# EAGLE board IMIKUbrd (EAGLE 7.7.0)
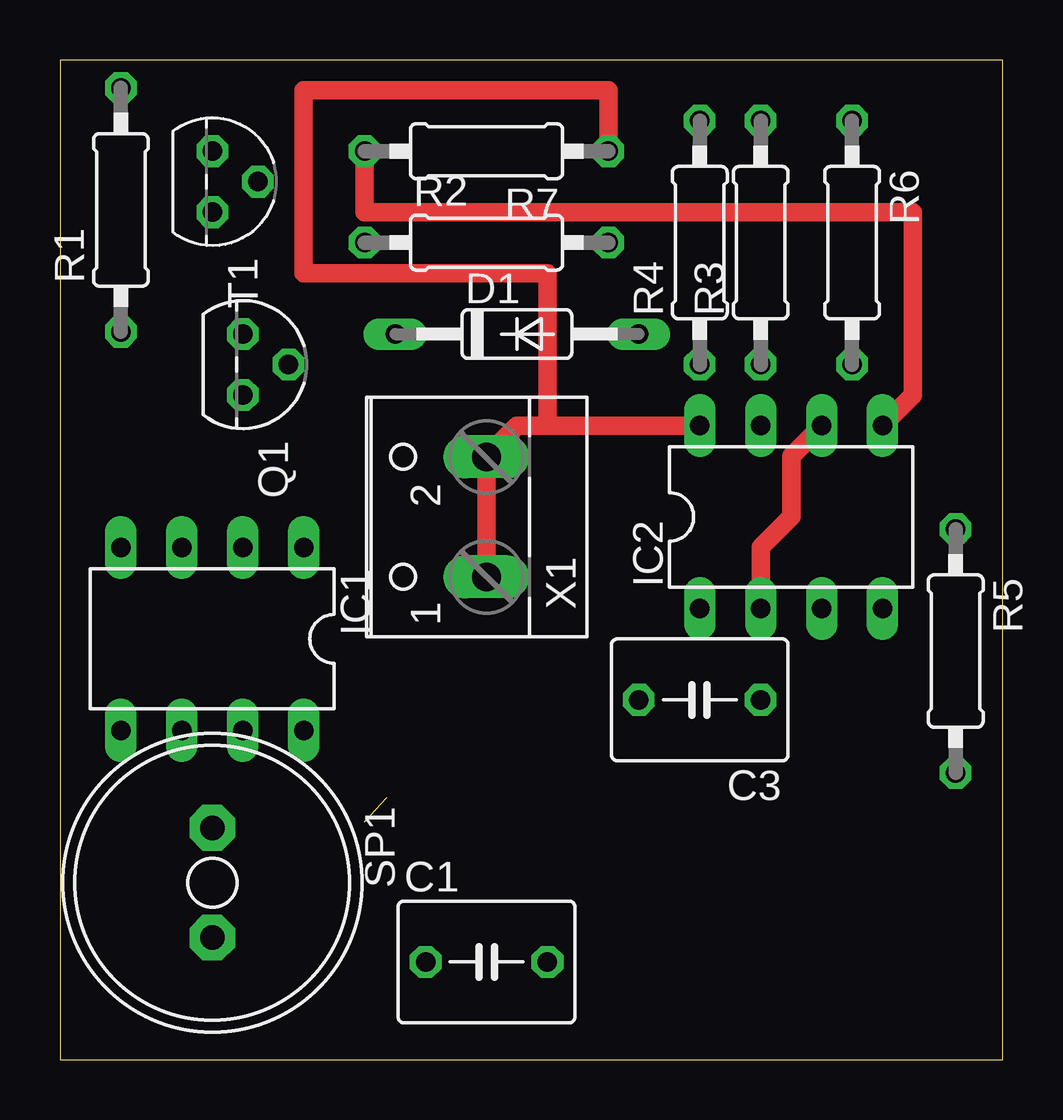
[diagram p0: board, top side]
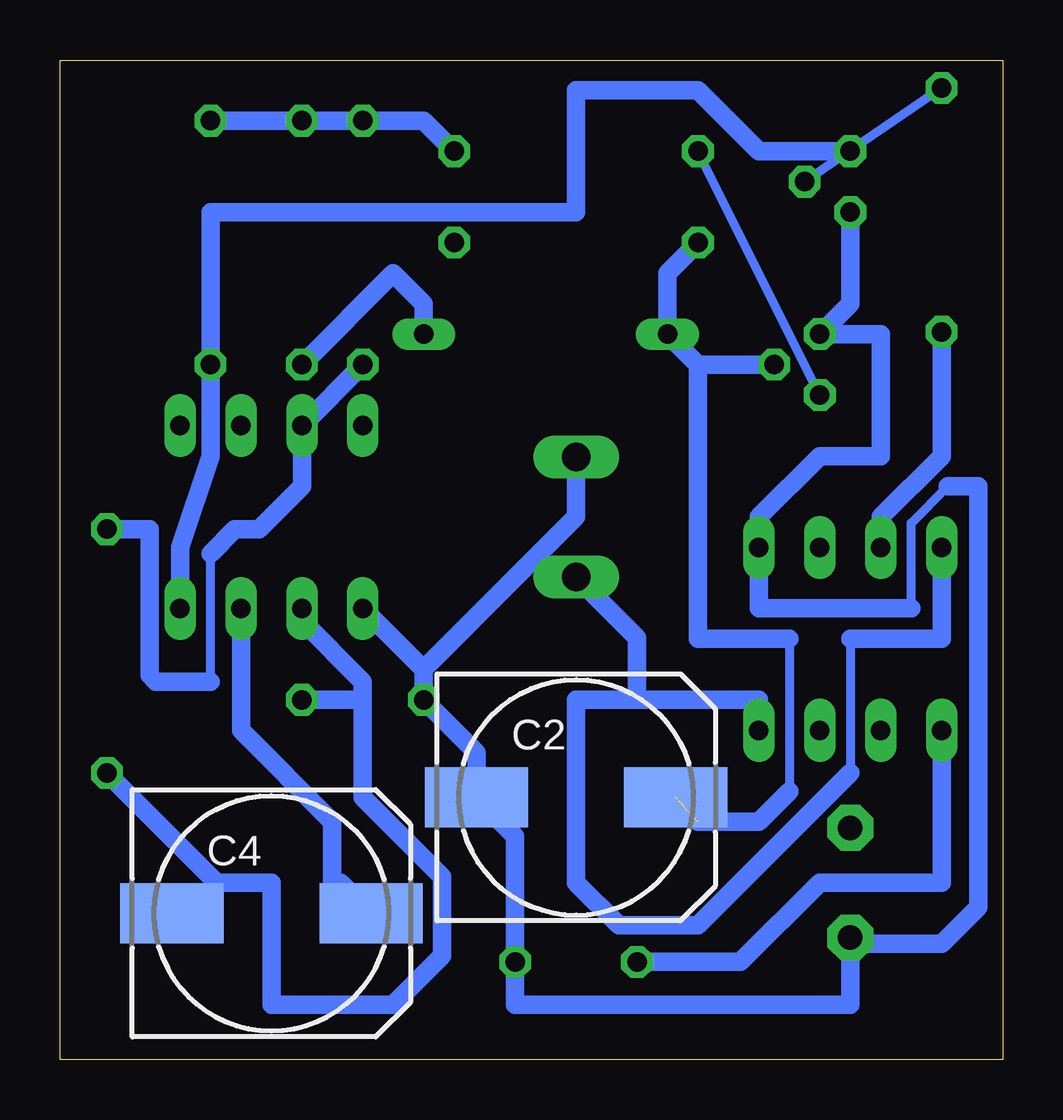
[diagram p1: board, bottom side, seen from below]

Size 39.29 x 41.65 mm. Coordinates in mm from the lower left corner, seen from the top.
Outline: 0,0 39.29,0 39.29,41.65 0,41.65 0,0
Copper layers (1*16): Top 0.035mm / dielectric 1.5mm / Bottom 0.035mm
Design rules "default": minimum track width 10mil, minimum drill 24mil, track to track 8mil, track to pad 8mil, pad to pad 8mil, via to via 8mil, smd to smd 8mil, copper to edge 40mil, drill to drill 8mil, minimum pad ring 10mil, minimum via ring 8mil, stop-mask expansion 4mil, vias tented up to drill 0mil, thermal gap 10mil

## Footprints (pad centres in the part's own frame; a part is rotated, then mirrored left to right if it is on the bottom)
C050-050X075 = drill 0.813 octagon: 1 -2.54,0; 2 2.54,0
140CLH-1014 = smd 4.3 x 2.5: + 4.15,0; - -4.15,0
DO35-10 = drill 0.813 long: A 5.08,0; C -5.08,0
DIL-08 = drill 0.813 long: 1 -3.81,-3.81; 2 -1.27,-3.81; 3 1.27,-3.81; 4 3.81,-3.81; 5 3.81,3.81; 6 1.27,3.81; 7 -1.27,3.81; 8 -3.81,3.81
TO92 = drill 0.813 octagon: 1 1.27,0; 2 0,1.905; 3 -1.27,0
0207/10 = drill 0.813 octagon: 1 -5.08,0; 2 5.08,0
AL11P = drill 1.016 pad 1.905 octagon: + 2.286,0; - -2.286,0
W237-102 = drill 1.194 long: 1 -2.5,-1.27; 2 2.5,-1.27

## Placement (x,y rotation side)
C1  100nF  [C050-050X075]  17.78,4.06 0 top
C2  470uF  [140CLH-1014]  17.78,10.92 0 bottom
C3  330nF  [C050-050X075]  26.67,14.99 180 top
C4  220uF  [140CLH-1014]  30.48,6.1 0 bottom
D1  1N4148DO35-10  [DO35-10]  19.05,30.23 0 top
IC1  NE555  [DIL-08]  6.35,17.53 180 top
IC2  NE555  [DIL-08]  30.48,22.61 0 top
Q1  BC557  [TO92]  7.62,28.96 270 top
R1  10k  [0207/10]  2.54,35.4 90 top
R2  1k  [0207/10]  17.78,34.04 0 top
R3  6k8  [0207/10]  29.21,34.04 90 top
R4  5k6  [0207/10]  26.67,34.04 90 top
R5  1k  [0207/10]  37.34,17.02 270 top
R6  1k  [0207/10]  33.02,34.04 270 top
R7  1k  [0207/10]  17.78,37.85 180 top
SP1  AL11P  [AL11P]  6.35,7.37 270 top
T1  BC547  [TO92]  6.35,36.58 270 top
X1  [W237-102]  16.51,22.61 90 top

## Library data of the parts
C1-C4 = rcl
D1 = diode
IC1 IC2 = st-microelectronics; MF: Arrow Electronics; MPN: NE555N; OC_FARNELL: 1467742; OC_NEWARK: 89K1486
Q1 = transistor-pnp
R1-R7 = resistor
SP1 = buzzer; OC_FARNELL: unknown; OC_NEWARK: unknown
T1 = transistor
X1 = con-wago-500; MPN: 237-102; OC_FARNELL: unknown; OC_NEWARK: 70K9898

## Nets
+5V: IC1.4 IC1.8 IC2.8 R3.2 R4.2 R6.1 R7.1 X1.1
GND: C1.2 C2.- C3.2 IC1.1 IC2.1 Q1.3 SP1.+ T1.1 X1.2
N$2: D1.A R3.1
N$3: C2.+ D1.C Q1.2 R2.1
N$4: R1.2 T1.2
N$5: C4.+ IC2.3
N$6: C3.1 IC2.2 IC2.6
N$7: IC2.7 R4.1 R5.1
N$8: C1.1 IC1.5
N$9: IC2.4 R6.2 T1.3
N$10: IC2.5 Q1.1 R7.2
S$1: R2.2

## Tracks (layer width: path | path; a pad name or v marks a point on that pad's centre or on a via)
+5V
  Top 0.762: R7.1 22.86,40.39 10.16,40.39 10.16,32.77 20.32,32.77 20.32,26.42 | IC2.8 20.32,26.42 | 20.32,26.42 19.05,26.42 17.78,25.15 X1.1
  Bottom 0.381: 6.35,17.53 6.35,11.94
  Bottom 0.762: X1.1 15.24,17.57 15.24,14.99 | 15.24,14.99 10.16,14.99 IC1.8 | R7.1 24.13,39.12 R4.2 R6.1 R3.2 | IC1.4 2.54,17.53 6.35,17.53 | 6.35,11.94 12.7,5.59 16,5.59 17.78,7.37 17.78,14.99 15.24,14.99
GND
  Bottom 0.381: 3.81,18.8 3.81,22.35 2.29,23.88
  Bottom 0.762: T1.1 6.35,31.5 Q1.3 5.08,30.23 5.08,25.15 7.62,25.15 10.16,22.61 IC1.1 10.16,18.8 3.81,18.8 | 24.13,16.26 C3.2 21.93,12.79 C2.- 20.32,9.31 C1.2 20.32,2.29 6.35,2.29 SP1.+ 6.1,4.83 2.54,4.83 1.02,6.35 1.02,23.88 2.29,23.88 | 24.13,16.26 IC2.1 | X1.2 17.78,22.61 24.13,16.26
N$2
  Bottom 0.762: R3.1 25.4,32.77 24.13,31.5 D1.A
N$3  (1 unrouted)
  Bottom 0.381: 8.89,17.53 8.89,11.18
  Bottom 0.762: R2.1 13.97,32.77 D1.C 12.7,28.96 | Q1.2 12.7,28.96 | 12.7,28.96 12.7,17.53 8.89,17.53 | 8.89,11.18 10.16,9.91 12.7,9.91
N$4
  Bottom 0.381: R1.2 T1.2
N$5
  Bottom 0.762: IC2.3 31.75,13.72 27.94,9.91 27.94,7.37 27.6,7.37 C4.+
N$6
  Top 0.762: IC2.2 29.21,21.34 30.48,22.61 30.48,25.15 IC2.6
  Bottom 0.762: IC2.2 29.21,18.29 26.67,15.75 26.67,14.99 | 26.67,14.99 26.67,10.92 23.37,7.62 23.37,4.32 25.4,2.29 30.48,2.29 30.48,7.37 32.77,7.37 37.34,11.94 | C3.1 26.67,14.99
N$7
  Bottom 0.381: 33.02,15.75 33.02,21.08
  Bottom 0.762: R4.1 IC2.7 29.21,23.88 30.99,22.1 32,22.1 33.02,21.08 | R5.1 35.56,22.1 35.56,16 35.31,15.75 33.02,15.75
N$8
  Bottom 0.762: C1.1 10.92,4.06 7.62,7.37 2.54,7.37 IC1.5
N$9
  Bottom 0.762: IC2.4 34.29,21.34 33.02,25.15 R6.2 33.02,35.31 17.78,35.31 17.78,40.39 12.7,40.39 10.16,37.85 T1.3
N$10
  Top 0.762: IC2.5 35.56,27.69 35.56,35.31 12.7,35.31 R7.2
  Bottom 0.381: Q1.1 R7.2
S$2
  Bottom 0.762: 2.54,30.23 2.54,25.15 5.08,22.61